# Altium PCB Power_distribution.PcbDoc
Units mil, origin at the board's own origin, x right, y up, seen from the top; angles counter-clockwise.
Board outline 3939.96 x 3343.5 mil, 2 copper layers (Top Layer, Bottom Layer); 43 components, 18 nets, 121 pads, 195 vias.
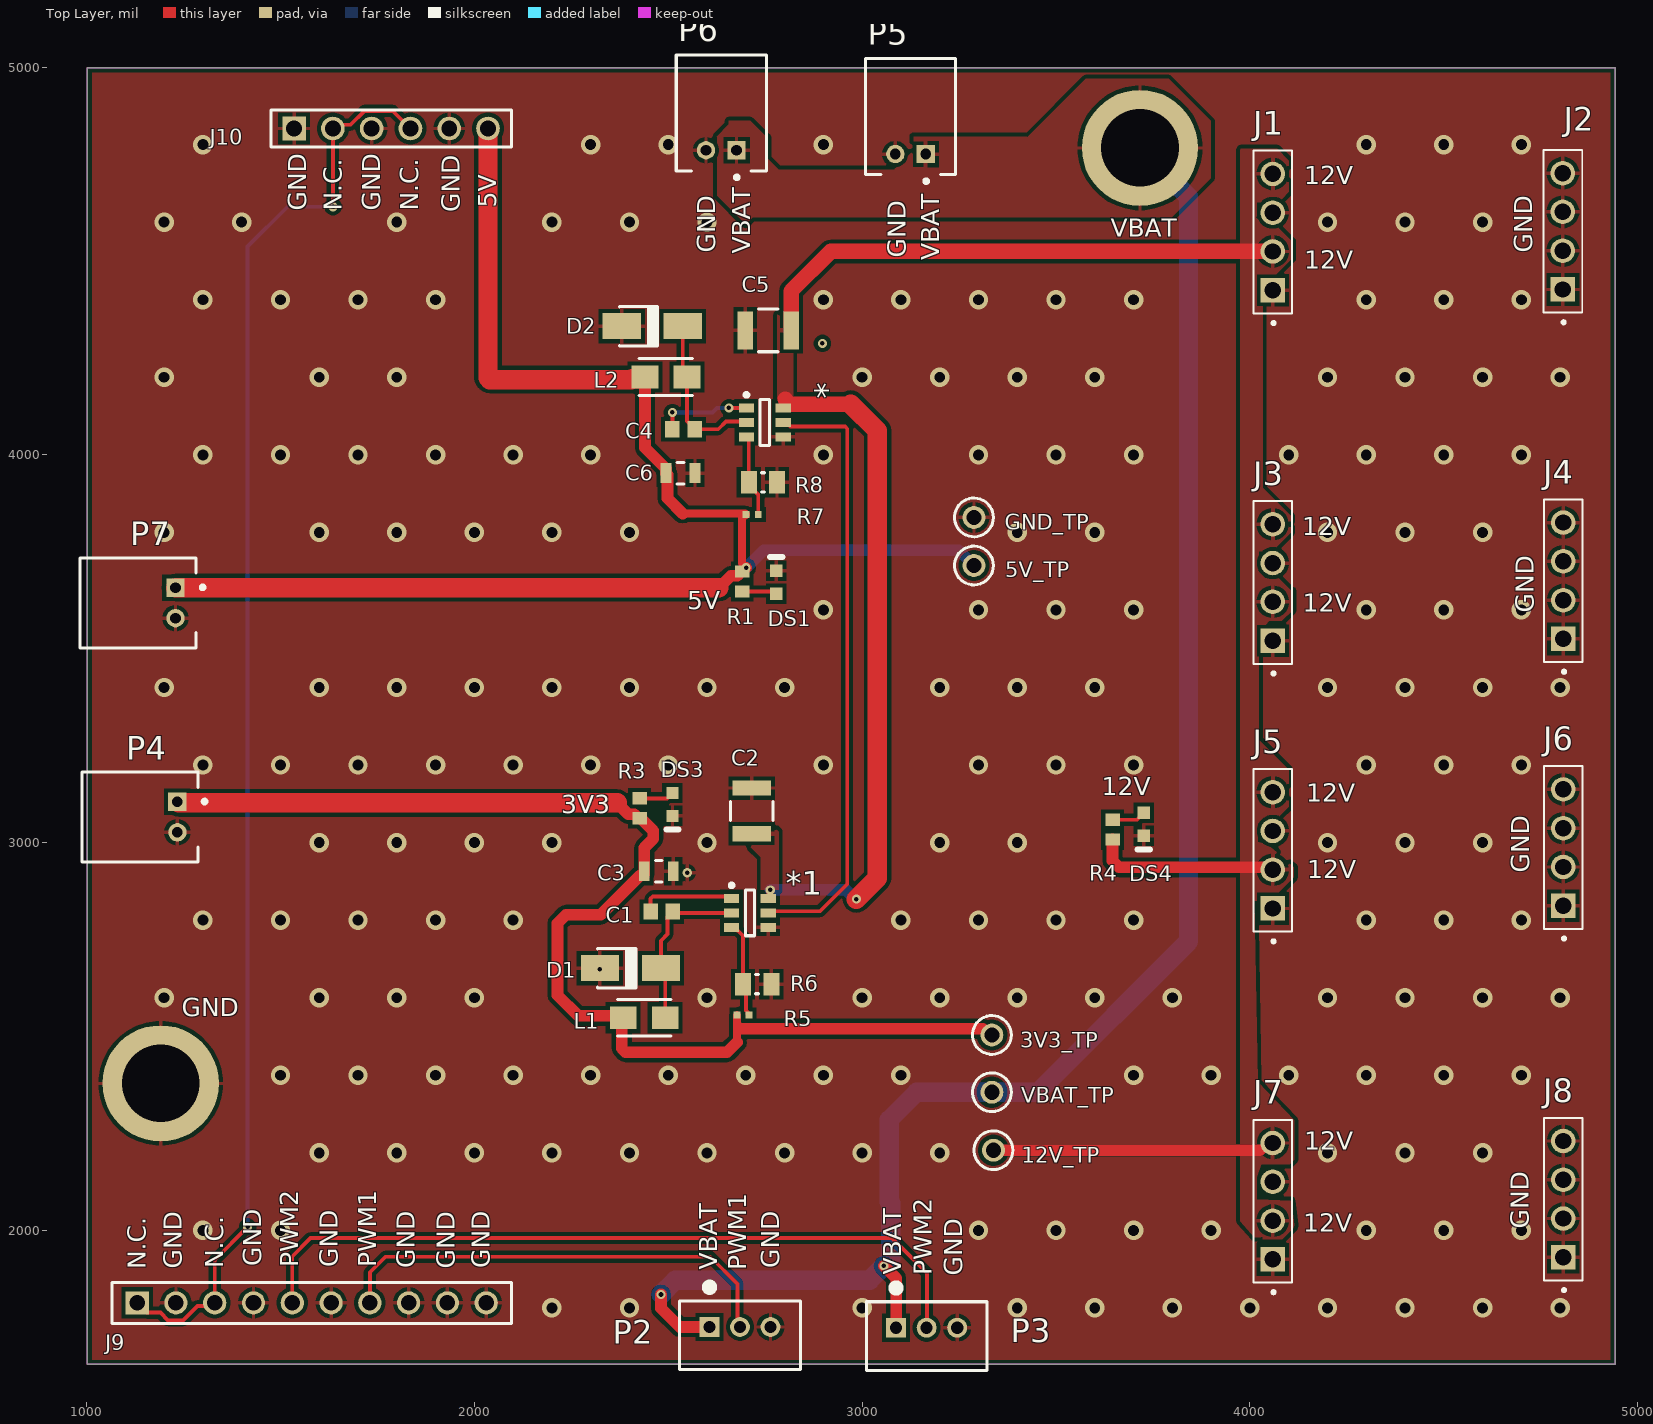
[diagram p0: Top Layer view]
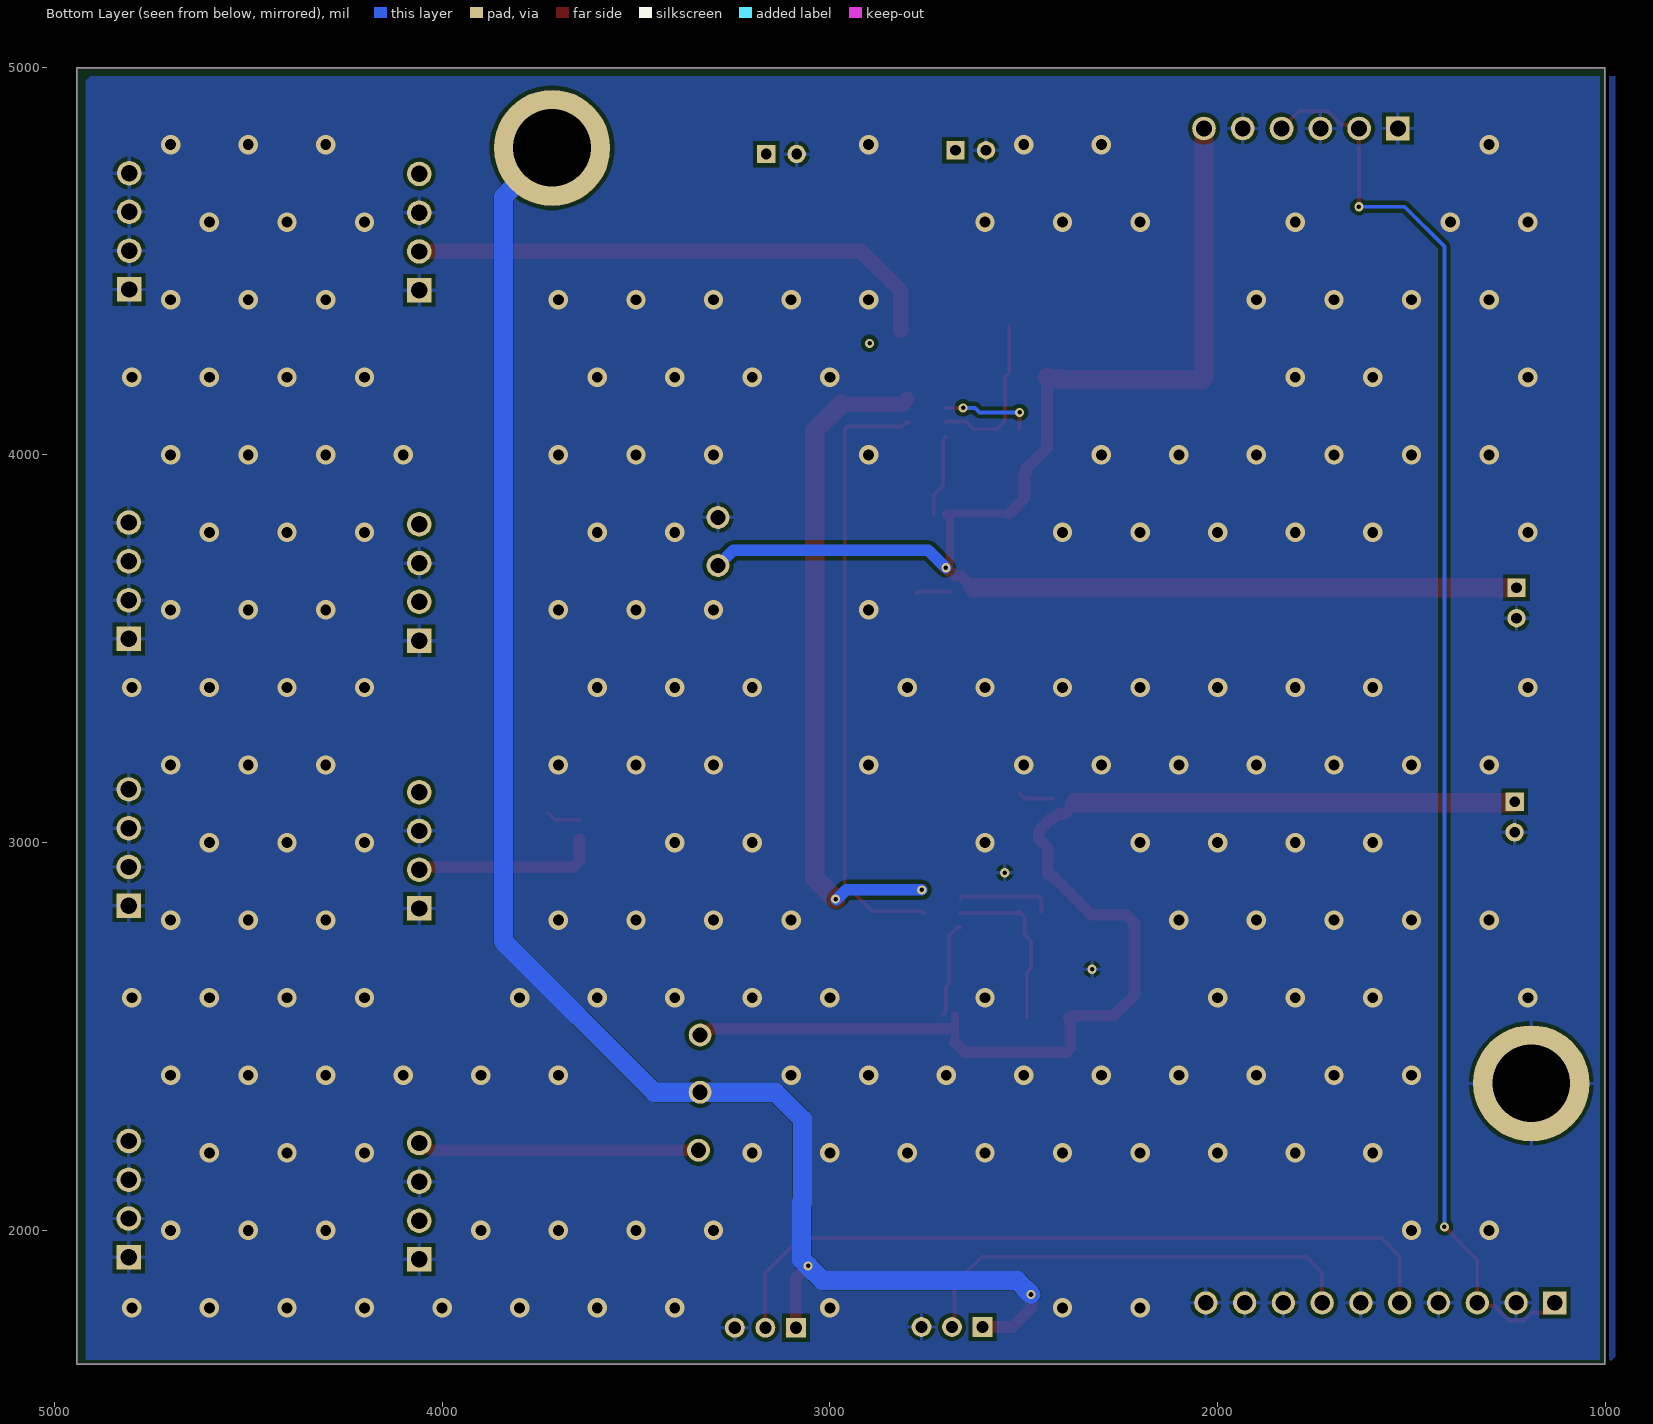
[diagram p1: Bottom Layer view, seen from below]
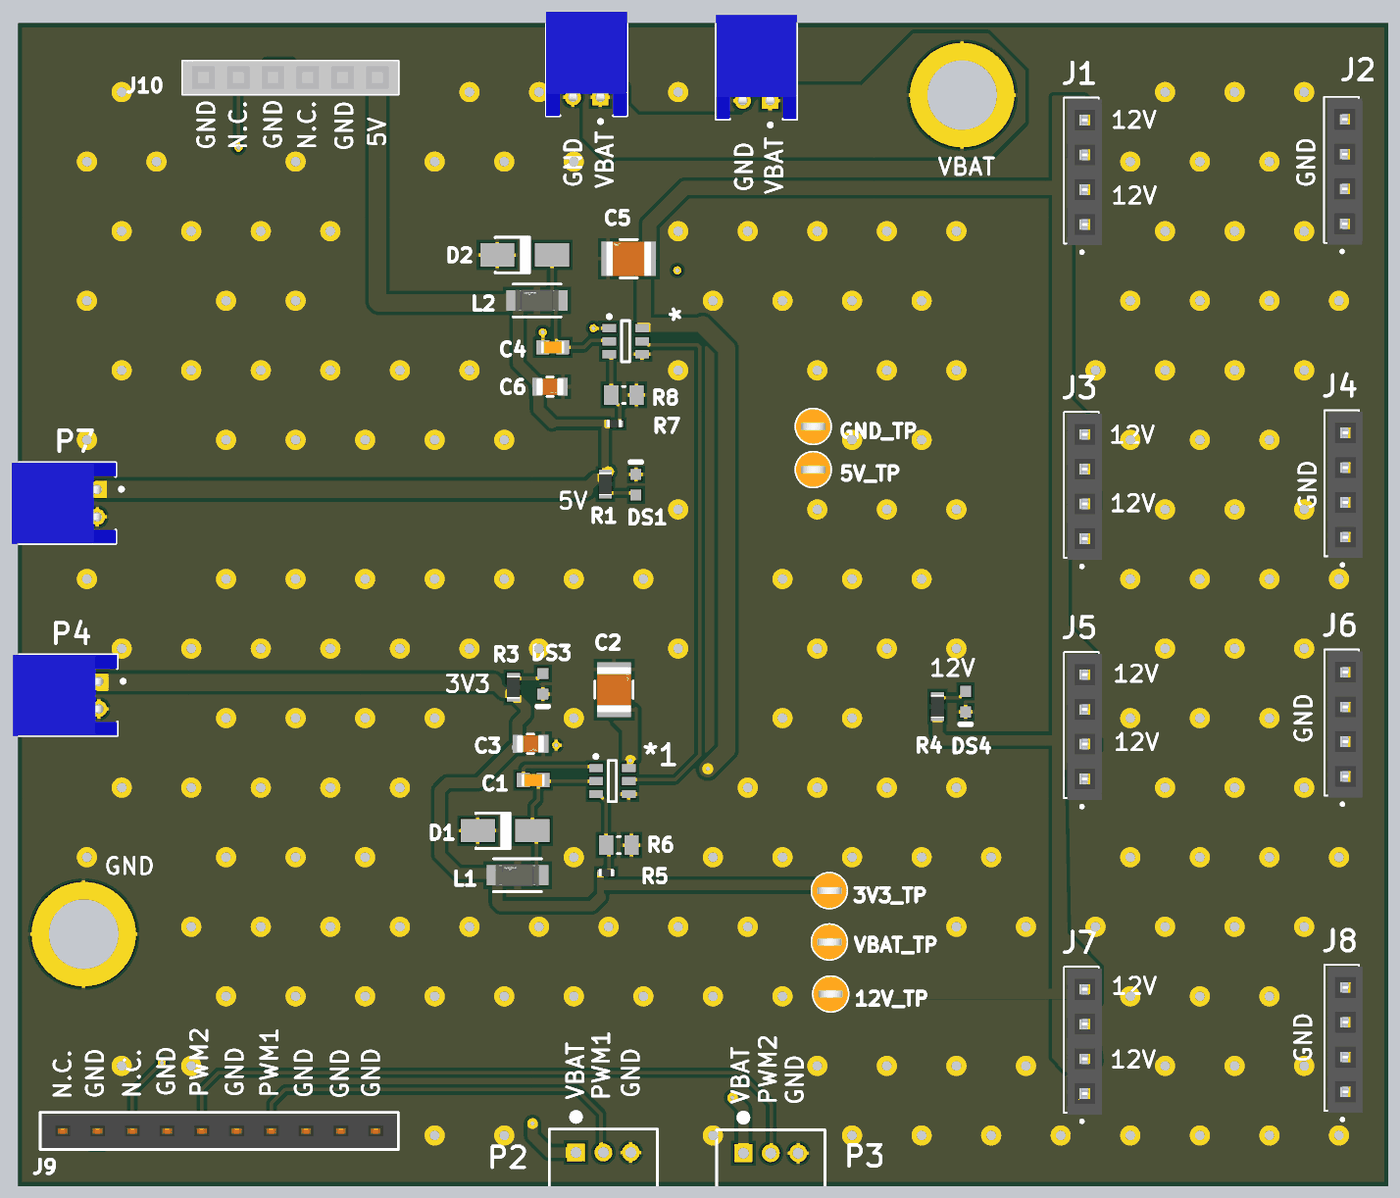
[diagram p2: 3D render of the assembled board from above, using the file's embedded part models]

## Layer stack, top to bottom
Top Solder: solder mask 0.4, Solder Resist, Dk 3.5
Top Layer: signal copper 1.4
Dielectric 1: dielectric 12.6, FR-4, Dk 4.8
Bottom Layer: signal copper 1.4
Bottom Solder: solder mask 0.4, Solder Resist, Dk 3.5

## Board outline
1001.97,1654.53 1001.97,4998.03 4941.93,4998.03 4941.93,1654.53

## Design rules (kind name [scope] priority, off if disabled: settings)
Clearance "Stitching GND" [IsStitchingVia and InNet('GND') vs (IsVia and (Not IsStitchingVia)) Or IsPad] p1: gap=39.37 ignorepadtopadclearanceinfootprint=FALSE
Clearance "Stitching No Net" [IsStitchingVia and InNet('No Net') vs (IsVia and (Not IsStitchingVia)) Or IsPad] p2: gap=5 ignorepadtopadclearanceinfootprint=FALSE
Clearance [All] p3: gap=0 ignorepadtopadclearanceinfootprint=FALSE
HoleSize [All] p1: absolutevalues=TRUE maxlimit=200 minlimit=1 maxpercent=80.000 minpercent=20.000
MinimumSolderMaskSliver [All] p1: minsoldermaskwidth=0
PolygonConnect [All] p1: connectstyle=Relief reliefconductorwidth=10 reliefentries=4 polygonreliefangle="90 Angle" airgapwidth=10
RoutingVias [All] p1: holewidth=28 width=50 viastyle="Through Hole" minholewidth=28 minwidth=50 maxholewidth=28 maxwidth=50
ShortCircuit [All] p1: allowed=TRUE
SilkToSilkClearance [All] p1: silktosilkclearance=0
SilkToSolderMaskClearance [IsPad] p1: minsilkscreentomaskgap=0 clearancetoexposedcopper=TRUE
SolderMaskExpansion [All] p1: expansion=4 istentingtop=FALSE
Width [All] p1: maxlimit=50 minlimit=10 preferedwidth=10 minimp=50.000000 maximp=50.000000 favimp=50.000000
25 further rules are at their usual default settings.

## Classes and differential pairs
component class Sheet3: 12V_TP DS1 DS3 DS4 GND_TP J1 J2 J3 J5 J6 J7 J8 J9 R1 R3 R4
component class Sheet1: 3V3_TP 5V_TP * *1 C1 C2 C3 C4 C5 C6 D1 D2 L1 L2 P2 P3 P4 P5 P6 P7 R5 R6 R7 R8 VBAT_TP

## Components (designator, comment, footprint, x,y, rotation, side; value= is the part's Value field where it differs from the comment)
3V3_TP "5003" KSTN-5003 3334.65,2503.94 r0 top (schematic designator TP4)
5V_TP "5003" KSTN-5003 3288.39,3714.57 r0 top (schematic designator TP5)
12V_TP "5003" KSTN-5003 3338.58,2206.69 r0 top (schematic designator TP2)
* "UD24121G-AG6-R" SOT95P245X110-6N 2789.02,4083.66 r0 top
*1 "UD24121G-AG6-R" SOT95P245X110-6N 2750.63,2818.9 r0 top
C1 "10nF" CAPC1608X90X35ML10T15 2483.27,2821.85 r0 top
C2 "10uF" FP-1210-L_3_3_0_4-W_2_5_0-MFG 2715.55,3081.69 r90 top
C3 "22uF" FP-GRM21B-0_15-MFG 2475.46,2926.18 r0 top
C4 "10nF" CAPC1608X90X35ML10T15 2539.37,4065.94 r0 top
C5 "10uF" FP-1210-L_3_3_0_4-W_2_5_0-MFG 2757.87,4320.87 r180 top
C6 "22uF" FP-GRM21B-0_15-MFG 2531.56,3952.76 r0 top
D1 "B230A-13-F" DIOD-SMA-2_V 2402.56,2676.18 r0 top
D2 "B230A-13-F" DIOD-SMA-2_V 2458.66,4331.69 r0 top
DS1 "HSMG-C190" AVAG-HSMX-C190_V 2778.55,3671.26 r90 top
DS3 "HSMH-C190" AVAG-HSMX-C190_V 2510.89,3098.43 r270 top
DS4 "HSMD-C190" AVAG-HSMX-C190_V 3726.37,3047.25 r270 top
GND_TP "5003" KSTN-5003 3288.39,3838.58 r0 top (schematic designator TP1)
J1 "PPTC041LFBN-RC" SULLINS_PPTC041LFBN-RC 4059.06,4574.41 r90 top
J2 "PPTC041LFBN-RC" SULLINS_PPTC041LFBN-RC 4807.09,4576.45 r90 top
J3 "PPTC041LFBN-RC" SULLINS_PPTC041LFBN-RC 4059.06,3670.83 r90 top
J4 "PPTC041LFBN-RC" SULLINS_PPTC041LFBN-RC 4808.07,3675.3 r90 top
J5 "PPTC041LFBN-RC" SULLINS_PPTC041LFBN-RC 4059.06,2980.12 r90 top
J6 "PPTC041LFBN-RC" SULLINS_PPTC041LFBN-RC 4808.07,2987.2 r90 top
J7 "PPTC041LFBN-RC" SULLINS_PPTC041LFBN-RC 4059.06,2075.24 r90 top
J8 "PPTC041LFBN-RC" SULLINS_PPTC041LFBN-RC 4808.07,2080.51 r90 top
J9 "61301011821" 61301011821 1580.51,1812.99 r0 top
J10 "SSW-106-02-T-S" SMTC-SSW-106-02-X-S 1535.24,4841.54 r0 top
L1 "4.7uH" FP-LQH31CN_03-MFG 2438.05,2548.23 r180 top
L2 "4.7uH" FP-LQH31CN_03-MFG 2494.16,4200.79 r180 top
P2 "B3B-PH-K-S(LF)(SN)" JST-B3B-PH-K-S-3_V 2685.04,1729.33 r0 top
P3 "B3B-PH-K-S(LF)(SN)" JST-B3B-PH-K-S-3_V 3166.34,1727.36 r0 top
P4 "S2B-PH-K-S(LF)(SN)" JST-S2B-PH-K-S_V 1137.8,3065.94 r270 top
P5 "S2B-PH-K-S(LF)(SN)" JST-S2B-PH-K-S_V 3125,4872.05 r180 top
P6 "S2B-PH-K-S(LF)(SN)" JST-S2B-PH-K-S_V 2636.81,4881.89 r180 top
P7 "S2B-PH-K-S(LF)(SN)" JST-S2B-PH-K-S_V 1132.87,3618.11 r270 top
R1 "1k" RESC1609X50X30NL8T20 2690.94,3673.23 r270 top
R3 "1k" RESC1609X50X30NL8T20 2426.18,3088.58 r90 top
R4 "1k" RESC1609X50X30NL8T20 3645.67,3033.46 r90 top
R5 "49.9K" RESC1005X40X25LL05T05 2692.91,2555.12 r180 top
R6 "16.2K" RESC2013X50X30NL20T20 2729.33,2634.84 r180 top
R7 "49.9K" RESC1005X40X25LL05T05 2716.54,3846.46 r180 top
R8 "16.2K" RESC2013X50X30NL20T20 2744.09,3929.13 r180 top
VBAT_TP "5003" KSTN-5003 3334.65,2356.3 r0 top (schematic designator TP3)

## Footprints (in the part's own frame and the unit in brackets; to place one, negate y for a bottom-side part, rotate by r counter-clockwise, add the part's x,y. Pads: shape width x height; smd on the part's side, far side on the other; paste and mask are expansions set on the pad)
61301011821 [mm] "Socket Header, Pitch 2.54 mm, THT, Vertical, single row, 10p"
  rect 1.52x1.52 hole 1.02: 1(-11.43,0)
  round 1.52 hole 1.02: 2(-8.89,0) 3(-6.35,0) 4(-3.81,0) 5(-1.27,0) 6(1.27,0) 7(3.81,0) 8(6.35,0) 9(8.89,0) 10(11.43,0)
  silkscreen extent -13.08,-1.35 13.08,1.35, body extent -12.95,-1.25 12.95,1.25, height 8.55
AVAG-HSMX-C190_V [mm] "SMD, 2-Leads, Body 1.6x0.8mm, Height 0.9mm"
  rect 0.8x0.8 smd: 1(-0.75,0) 2(0.75,0)
  silkscreen extent 1.65,-0.4 1.65,0.4, body extent -0.8,-0.4 0.8,0.4, height 0.9
CAPC1608X90X35ML10T15 [mm] "Chip Capacitor, 2-Leads, Body 1.7x0.9mm, IPC Low Density"
  rect 0.95x1.05 smd: 1(-0.725,0) 2(0.725,0)
  body extent -0.85,-0.45 0.85,0.45, height 0.9
DIOD-SMA-2_V [mm] "SMA, 2-Leads, Body 4.3x2.605mm, Height 2.3mm"
  rect 2.5x1.7 smd: 1(-2,0) 2(2,0)
  silkscreen extent -2.15,-1.3 0.35,1.33, body extent -2.15,-1.3 2.15,1.3, height 2.3
FP-1210-L_3_3_0_4-W_2_5_0-MFG [mm]
  rect 1x2.5 smd paste+0 mask+0: 1(-1.5,0) 2(1.5,0)
  silkscreen extent -0.62,-1.4 0.62,1.4, body extent -2.1,-1.5 2.1,1.5, height 0.25
FP-GRM21B-0_15-MFG [mm]
  rect 0.7x1.3 smd paste+0 mask+0: 1(-0.95,0) 2(0.95,0)
  silkscreen extent -0.23,-0.7 0.23,0.7, body extent -1.4,-0.8 1.4,0.8, height 0.25
FP-LQH31CN_03-MFG [mm]
  rect 1.75x1.5 smd paste+0 mask+0: 1(-1.375,0) 2(1.375,0)
  silkscreen extent -1.75,-1.2 1.75,1.2, body extent -2.35,-1 2.35,1, height 0.25
JST-B3B-PH-K-S-3_V [mm] "Connector, 3-Leads, Body 7.9x4.5mm, Pitch 2mm"
  rect 1.3x1.3 hole 0.8: 1(-2,0.55)
  round 1.3 hole 0.8: 2(0,0.55) 3(2,0.55)
  silkscreen extent -3.95,-2.25 3.95,3.4, body extent -3.95,-2.25 3.95,2.25, height 6
JST-S2B-PH-K-S_V [mm] "THD, 2-Leads, Body 7.6x5.9mm, Pitch 2mm"
  rect 1.2x1.2 hole 0.7: 1(-1,2.45)
  round 1.2 hole 0.7: 2(1,2.45)
  silkscreen extent -2.95,-3.8 2.95,4.35, body extent -2.95,-3.8 2.95,3.8, height 4.8
KSTN-5003 [mm] "Test Point, Through Hole, Dia 2.54mm"
  round 1.5 hole 1: 1(0,0)
  silkscreen extent -1.27,-1.27 1.27,1.27, body extent -1.27,-1.27 1.27,1.27, height 4.57
RESC1005X40X25LL05T05 [mm] "Chip Resistor, 2-Leads, Body 1.05x0.55mm, IPC High Density"
  rect 0.45x0.45 smd: 1(-0.4,0) 2(0.4,0)
  body extent -0.53,-0.28 0.53,0.28, height 0.4
RESC1609X50X30NL8T20 [mm] "Chip Resistor, 2-Leads, Body 1.65x0.95mm, IPC Medium Density"
  rect 0.8x0.95 smd: 1(-0.65,0) 2(0.65,0)
  body extent -0.82,-0.48 0.82,0.48, height 0.5
RESC2013X50X30NL20T20 [mm] "Chip Resistor, 2-Leads, Body 2.00x1.25mm, IPC Medium Density"
  rect 1.05x1.45 smd: 1(-0.925,0) 2(0.925,0)
  silkscreen extent -0.1,-0.63 0.1,0.63, body extent -1.1,-0.72 1.1,0.72, height 0.5
SMTC-SSW-106-02-X-S [mm] "SQ Post Socket, 1x6 Pins, Vertical, 2.54mm Pitch, Female"
  rect 1.55x1.55 hole 1.04: 1(0,0)
  round 1.55 hole 1.04: 2(2.54,0) 3(5.08,0) 4(7.62,0) 5(10.16,0) 6(12.7,0)
  silkscreen extent -1.53,-1.2 14.23,1.2, body extent -1.52,-1.21 14.22,1.21, height 8.51
SOT95P245X110-6N [mm] "SOT23, 6-Leads, Body 2,90x2,45mm, Pitch 0,95mm, IPC Medium Density"
  rect 1x0.6 smd: 1(-2.216,0.95) 2(-2.216,0) 3(-2.216,-0.95) 4(0.184,-0.95) 5(0.184,0) 6(0.184,0.95)
  silkscreen extent -2.34,-1.5 -0.72,1.92, body extent -1.72,-1.5 -0.32,1.5, height 1.1
SULLINS_PPTC041LFBN-RC [mm]
  rect 1.605x1.605 hole 1.07: 1(-3.81,0)
  round 1.605 hole 1.07: 2(-1.27,0) 3(1.27,0) 4(3.81,0)
  silkscreen extent -6.06,-1.27 5.33,1.27, body extent -5.46,-1.52 5.21,1.02, height 8.51

## Part data
3V3_TP 5V_TP 12V_TP GND_TP VBAT_TP: library part CMP-1672-00009-1, "Test Point, Orange, 1-Pin THD, RoHS", Forward Current="3 A", Forward Voltage="1.08 V", Max Operating Temperature="150 degC", Max Surge Current="80 A", Min Operating Temperature="-65 degC", Package Quantity=500, Peak Reverse Current="600 uA", ComponentLink1Description="Manufacturer URL", ComponentLink1URL=http://www.keyelco.com/, ComponentLink2Description=Datasheet, ComponentLink2URL=http://keyelco.com/userAssets/file/M65p56.pdf, DatasheetVersion=Jun-15, Diameter="5.3 mm", Height="0.25 inch", Length="9.5 mm", Mount="Through Hole", PackageDescription="1-Pin Through Hole Device, Dia 2.54 mm", PackageReference=5003, Packaging=Bulk, Pins=2, Radiation Hardening=No, REACH SVHC="No SVHC", RoHSCompliant=true, Weight="0.01 lb", Width="0.25 inch"
C1 C4: library part CMP-2100-03642-1, "Chip Capacitor, 10 nF, +/- 10%, 50 V, -55 to 125 degC, 0603 (1608 Metric), RoHS, Tape and Reel", Case Code (Metric)=1608, Case Code (Imperial)=0603, Dielectric=X7R, Dielectric Material=Ceramic, Manufacturer=Murata, Max Operating Temperature=125degC, Min Operating Temperature=-55degC, Package Description="2-Pin Surface Mount Device, Body 1.6 x 0.8 mm", Package Quantity=1, Tolerance=10%, Voltage=50V, Insulation Resistance=10GR, Capacitance=10nF, Case/Package=0603, Datasheet URL=http://search.murata.co.jp/Ceramy/image/img/A01X/G101/ENG/GRM188R71H103KA01-01.pdf, Datasheet Version=42401.0, Depth=0.8mm, Height=0.8mm, Lead Free=LeadFree, Length=1.6mm, Manufacturer URL=http://www.murata.com/, Material=Ceramic, Mount=SurfaceMount, Number of Pins=2, Package Reference=0603, Packaging=TapeandReel, REACH SVHC=Unknown, RoHSCompliant=True, Termination=SMD/SMT, Thickness=0.035inch, Voltage Rating=50V, Voltage Rating (DC)=50V, Width=0.031inch
C2 C5: library part CMP-2000-05477-2, "General Purpose Ceramic Capacitor, 1210, 10uF, 10%, X5R, 15%, 25V", Case Code (Metric)=3225, Case Code (Imperial)=1210, Dielectric=X5R, Max Operating Temperature=85°C, Min Operating Temperature=-55°C, Package Quantity=1, Tolerance=10%, Voltage=25V, Capacitance=10uF, Case/Package=1210, Construction=Flat, Contact Plating=Tin, Depth=2.5mm, Height=2.29mm, Lead Free="Lead Free", Length=3.2mm, Mount="Surface Mount", Packaging="Tape and Reel", Radiation Hardening=No, REACH SVHC="No SVHC", RoHS Compliant=Yes, Series=-, Termination=SMD/SMT, Thickness=0.11inch, Voltage Rating=25V, Voltage Rating (DC)=25V, Width=0.098inch
C3 C6: library part CMP-2007-03385-2, "Chip Multilayer Ceramic Capacitors for General Purpose, 0805, 22uF, X5R, 15%, 20%, 6.3V", Case Code (Metric)=2012, Case Code (Imperial)=0805, Dielectric=X5R, Max Operating Temperature=85°C, Min Operating Temperature=-55°C, Package Quantity=1, Tolerance=20%, Voltage=6.3V, Capacitance=22uF, Case/Package=0805, Depth=1.25mm, Height=1.25mm, Lead Free="Lead Free", Length=2mm, Material=Ceramic, Mount="Surface Mount", Packaging="Tape and Reel", Radiation Hardening=No, REACH SVHC="No SVHC", Termination=SMD/SMT, Thickness=0.053inch, Voltage Rating=6.3V, Voltage Rating (DC)=6.3V, Width=0.049inch
D1 D2: library part CMP-0905-00001-1, "2 A Surface Mount Schottky Barrier Rectifier, 30 V, -65 to 150 degC, 2-Pin SMA, RoHS, Tape and Reel", Manufacturer="Diodes Inc", Temperature Range="-65 to 150 degC", ComponentLink1Description="Manufacturer URL", ComponentLink1URL=http://diodes.com/, ComponentLink2Description=Datasheet, ComponentLink2URL=http://diodes.com/datasheets/ds13004.pdf, CT="200 pF", DatasheetVersion="Rev. 21 - 2", Mounting Technology="Surface Mount", PackageDescription="2-Pin SMA, Body 4.3 x 2.605 mm, Height 2.3 mm", PackageReference=SMA-2, Packing="Tape and Reel", PartNumber=B230A-13-F, RoHS=TRUE, VF="0.5 V", VR="30 V", VRRM="30 V", IF="2 A", IFSM="50 A", IO="2 A Max."
DS1: library part CMP-1744-00002-1, "Chip LED, Green, 2.2 V, -40 to 85 degC, 2-Pin SMD, RoHS, Tape and Reel", Case\Package=SOIC, Clock Frequency="100 KHz", Frequency="400 KHz", Max Operating Temperature="85 degC", Max Supply Voltage="5.5 V", Min Operating Temperature="-40 degC", Min Supply Voltage="1.7 V", Nominal Supply Current="2 mA", Package Quantity=3000, Access Time="3500 ns", ComponentLink1Description="Manufacturer URL", ComponentLink1URL=http://www.avagotech.com/, ComponentLink2Description=Datasheet, ComponentLink2URL=http://docs.avagotech.com/docs/AV02-0551EN, ComponentLink3Description="Package Specification", ComponentLink3URL=http://www.fairchildsemi.com/dwg/MA/MA03D.pdf, DatasheetVersion=Mar-12, Density="32 kb", Height="1.5 mm", Length="5 mm", Max Clock Frequency="100 KHz", Mount="Surface Mount", PackageDescription="2-Pin Surface Mount Device, Body 1.6 x 0.8 mm, Height 0.9 mm", PackageReference=HSMX-C190, Packaging="Tape and Reel", Pins=8, Radiation Hardening=No, REACH SVHC="No SVHC", RoHSCompliant=true, Width="4 mm", Interface=Serial
DS3: library part CMP-1744-00004-1, "LED Uni-Color Red, 65 mW, 20 mA, -40 to 85 degC, 2-Pin SMD, RoHS, Tape and Reel", Current Rating="1 A", Max Operating Temperature="85 degC", Min Operating Temperature="-30 degC", Package Quantity=2000, ComponentLink1Description="Manufacturer URL", ComponentLink1URL=http://www.avagotech.com/, ComponentLink2Description=Datasheet, ComponentLink2URL=http://docs.avagotech.com/docs/AV02-0551EN, ComponentLink3Description="Package Specification", ComponentLink3URL=http://www.fairchildsemi.com/dwg/MA/MA03D.pdf, Connector Type=USB, Contact Material=Copper, Contact Plating=Gold, DatasheetVersion=Mar-12, Gender=Male, Height="2.8 mm", Lead Pitch="0.65 mm", Length="7.5 mm", Mount="Surface Mount", PackageDescription="2-Pin Surface Mount Device, Body 1.6 x 0.8 mm, Height 0.9 mm", PackageReference=HSMX-C190, Packaging="Tape and Reel", Pins=5, REACH SVHC="No SVHC", RoHSCompliant=true, Width="5.6 mm"
DS4: library part CMP-1744-00006-1, "LED Uni-Color Orange, 52 mW, 20 mA, -40 to 85 degC, 2-Pin SMD, RoHS, Tape and Reel", Max Operating Temperature=225degC, Min Operating Temperature=-40degC, Package Quantity=100, ComponentLink1Description="Manufacturer URL", ComponentLink1URL=http://www.avagotech.com/, ComponentLink2Description=Datasheet, ComponentLink2URL=http://docs.avagotech.com/docs/AV02-0551EN, ComponentLink3Description="Package Specification", ComponentLink3URL=http://www.fairchildsemi.com/dwg/MA/MA03D.pdf, DatasheetVersion=Mar-12, PackageDescription="2-Pin Surface Mount Device, Body 1.6 x 0.8 mm, Height 0.9 mm", PackageReference=HSMX-C190, RoHSCompliant=True
J1 J2 J3 J4 J5 J6 J7 J8: "4 Position Header Connector Through Hole", Package=None, Availability=Warning, Check_prices=https://www.snapeda.com/parts/PPTC041LFBN-RC/Sullins%20Connector%20Solutions/view-part/285917/?ref=eda, MF="Sullins Connector", MP=PPTC041LFBN-RC, Price=None, Purchase-URL=https://pricing.snapeda.com/search/part/PPTC041LFBN-RC/?ref=eda, SnapEDA_Link=https://www.snapeda.com/parts/PPTC041LFBN-RC/Sullins%20Connector%20Solutions/view-part/285917/?ref=snap
J9: library part CMP-1502-01332-1, "THT Vertical Socket Header WR-PHD, Pitch 2.54 mm, Single Row, 10 pins", Contact Resistance=20mOhm, Manufacturer="Wurth Elektronik", Operating Temperature=-40to125degC, Rated Current=3A, Withstanding Voltage=500VAC, Working Voltage=250VAC, Datasheet URL=https://katalog.we-online.de/em/datasheet/6130xx11821.pdf, Gender=Female, Manufacturer URL=http://www.we-online.de, Mounting Technology=THT, Orientation=Vertical, Package Reference=61301011821, Packaging=Tray, Part Number=61301011821, Pin Number=10, Pitch=2.54mm, Publisher=WurthElektronik, Row Number=Single
J10: library part CMP-1023-00360-1, "SQ Post Socket, Through-hole, Vertical, -55 to 105 degC, 2.54mm Pitch, 6-Pin, Female, RoHS", Manufacturer=Samtec, Temperature Range="-55 to 105 degC", ComponentLink1Description="Manufacturer URL", ComponentLink1URL=http://www.samtec.com, ComponentLink2Description=Datasheet, ComponentLink2URL=http://www.samtec.com/documents/webfiles/pdf/SSW_TH.PDF, ComponentLink3Description="Package Specification", ComponentLink3URL=http://www.samtec.com/documents/webfiles/cpdf/SSW-1XX-XX-XXX-X-XX-XXX-XX-MKT.pdf, DatasheetVersion=F-214, Mounting Technology=Through-hole, Orientation=Vertical, PackageDescription="Assembly, Socket Strip .016 X .031 Tail", PackageReference=SSW-106-02-X-S, PackageVersion="CA, 6/1987", PartNumber=SSW-106-02-T-S, Pitch="2.54 mm", RoHS=True
L1 L2: library part CMP-06042-006664-1, "Wire Wound Ferrite Inductor for General Circuits 4.7μH ±10% 2.21Ω 120mA 1206", Case Code (Metric)=3216, Case Code (Imperial)=1206, Current=105mA, Current Rating=120mA, DC Resistance (DCR)=1.7R, Max Operating Temperature=85°C, Min Operating Temperature=-25°C, Package Quantity=1, Self Resonant Frequency=31MHz, Test Frequency=1MHz, Tolerance=10%, Case/Package=1206, Core Material=Ferrite, DC Current=120mA, Depth=1.8mm, Height=1.8mm, Lead Free="Lead Free", Length=0.125inch, Max DC Current=120mA, Military Standard=Not, Mount="Surface Mount", Packaging="Tape and Reel", Q Factor=35, Radiation Hardening=No, REACH SVHC="No SVHC", Shielding=Unshielded, Termination=SMD/SMT, Weight=0.001023oz, Width=1.6mm, Inductance=4.7uH, Inductance Tolerance=10%
P2 P3: library part CMP-2000-05164-1, "Male Header, Pitch 2 mm, 1 x 3 Position, Height 6 mm, Tail Length 3.4 mm, -25 to 85 degC, RoHS, Bulk", Manufacturer=JST, Datasheet URL=https://datasheet.ciiva.com/11746/0900766b80826550-11746939.pdf, Datasheet Version=Oct-06, Manufacturer URL=http://www.jst.com/home2.html, No of Positions=3, Pitch=2mm, Style/Orientation=StraightHeader/Plug, Termination=Crimp, Type=ShroudedHeader
P4 P5 P6 P7: library part CMP-1755-00004-1, "Male Header, Pitch 2 mm, 1 x 2 Position, Height 4.8 mm, Tail Length 3.4 mm, -25 to 85 degC, RoHS, Bulk", Capacitance="10 uF", Case\Package=Radial, Max Operating Temperature="85 degC", Min Operating Temperature="-40 degC", Package Quantity=200, Tolerance=20%, Voltage Rating="50 V", ComponentLink1Description=Datasheet, ComponentLink1URL=http://www.jst-mfg.com/product/pdf/eng/ePH.pdf, DatasheetVersion=Dec-12, Diameter="5 mm", Height="11 mm", Lead Pitch="2 mm", Length="11 mm", Mount="Through Hole", PackageDescription="Male Header, Pitch 2 mm, 1 x 2 Position, Height 4.8 mm, Tail Length 3.4 mm", PackageReference=S2B-PH-K-S, Packaging=Bulk, Pins=2, Radiation Hardening=No, REACH SVHC="No SVHC", RoHSCompliant=true, Voltage Rating (DC)="50 V"
R1 R3 R4: library part CMP-2000-03816-5, "Chip Resistor, 0 Ohm, Jumper, 100 mW, -55 to 155 degC, 0603 (1608 Metric), RoHS, Tape and Reel", Manufacturer="Vishay Semiconductor", Max Operating Temperature="155 degC", Min Operating Temperature="-55 degC", Package Quantity=5000, Voltage Rating="75 V", ComponentLink1Description="Manufacturer URL", ComponentLink1URL=http://www.vishay.com/, ComponentLink2Description=Datasheet, ComponentLink2URL=http://www.vishay.com/docs/20035/dcrcwe3.pdf, DatasheetVersion=06/2012, Height="0.45 mm", Length="1.55 mm", Mount="Surface Mount", Mounting Technology="Surface Mount", PackageDescription="2-Pin Surface Mount Device, Body 1.575 x 0.85 mm", PackageReference=0603, Packaging="Tape and Reel", Pins=2, REACH SVHC=Unknown, RoHSCompliant=true
R5 R7: library part CMP-2002-00967-3, "Chip Resistor, 49.9 KOhm, +/- 1%, 100 mW, -55 to 155 degC, 0402 (1005 Metric), RoHS, Tape and Reel", Case Code (Metric)=1005, Case Code (Imperial)=0402, Manufacturer="Basic Passives", Max Operating Temperature="155 degC", Min Operating Temperature="-55 degC", Package Quantity=10000, PartNumber=ERJ-2RKF4992X, Power Rating="100 mW", Resistance="49.9 KOhm", Tolerance=1%, Voltage Rating="50 V", Case\/Package=0402, ComponentLink1Description="Manufacturer URL", ComponentLink1URL=http://www.panasonic.com/, ComponentLink2Description=Datasheet, ComponentLink2URL=http://industrial.panasonic.com/cdbs/www-data/pdf/RDA0000/AOA0000C86.pdf, DatasheetVersion=04/2015, Height="0.35 mm", Length="1 mm", Mount="Surface Mount", Mounting Technology="Surface Mount", PackageDescription="2-Pin Surface Mount Device, Body 1 x 0.5 mm", PackageReference=0402, Packaging="Tape and Reel", Pins=2, Radiation Hardening=No, REACH SVHC="No SVHC", RoHSCompliant=true, Width="0.5 mm"
R6 R8: library part CMP-1013-00645-2, Manufacturer="Vishay Dale", Part Number=CRCW080516K2FKEA

## Free pads (board coordinates)
  round 300 hole 200: 2(1190.94,2378.94) 2(3716.54,4791.34)

## Via types
v1: diameter 50, hole 28, Top Layer to Bottom Layer, 183 vias
v2: diameter 23.62, hole 11.81, Top Layer to Bottom Layer, 12 vias

## Nets (pads, with @x,y where several pads share a name; then routed paths per layer and width w, separated by ;. In a path a pad name is that pad's centre, name@x,y a point inside that pad or via, vN(x,y) a via of type N, cw(c..) or ccw(c..) an arc to the next point about the centre after c; other vN are vias at no path point)
3V3: 3V3_TP.1 C3.1 L1.2 P4.1 R3.1 R5.2 | length 3177.7
  Top Layer w10: R5.2 2679.09,2553.19 2681.02,2551.26 2681.02,2543.83
  Top Layer w20: 2677.17,2485.24 2677.17,2519.68 2677.17,2532.48 ; R5.2 2677.17,2532.48 ; 2689.96,2519.68 2677.17,2532.48
  Top Layer w30: P4.1 P4.1@1237.2,3102.36 ; 2368.19,3102.36 2397.12,3073.43 2412.8,3073.43 2422.48,3063.74 2425.43,3063.74 R3.1 ; R3.1@2429.13,3062.99 2461.61,3030.51 2461.61,3009.84 2438.05,2986.28 2438.05,2916.81 2436.83,2915.59 2427.46,2915.59 2325.9,2814.02 2236.27,2814.02 2214.57,2792.32 2214.57,2606.3 2267.72,2553.15 2364.47,2553.15 2374.08,2553.15 2379,2548.23 L1.2 2379.92,2544.23 2379.92,2469.49 2389.76,2459.65 2651.57,2459.65 2677.17,2485.24 ; 2689.96,2519.68 3311.04,2519.68 3326.78,2503.94 3V3_TP.1
  Top Layer w50: P4.1@1237.2,3102.36 2368.19,3102.36
+5: 5V_TP.1 C6.1 J10.6 L2.2 P7.1 R1.1 R7.2 | length 3861
  Top Layer w20: 2537.4,3848.43 2698.82,3848.43 R7.2 2700.79,3845.57 2689.96,3834.74 2689.96,3720.47 2700.79,3709.64 v2(2700.79,3708.66)
  Top Layer w30: L2.2@2440.02,4189.96 2440.02,4018.7 2494.16,3964.57 C6.1 2498.03,3948.88 2498.03,3887.8 2537.4,3848.43 ; 2630.98,3657.48 2661.89,3688.39 2677.56,3688.39 2687.99,3698.82 R1.1 v2(2700.79,3708.66)
  Top Layer w40: 2035.24,4198.03 2039.37,4193.9
  Top Layer w50: P7.1 2630.98,3657.48 ; 2035.24,4198.03 J10.6 ; 2039.37,4193.9 2404.51,4193.9 2406.87,4196.26 2435.5,4196.26 L2.2
  Bottom Layer w30: v2(2700.79,3708.66) 2746.06,3753.94 3249.02,3753.94 5V_TP.1
+12: 12V_TP.1 *1.6 *.6 C2.1 C5.1 J1.2 J1.4 J3.2 J3.4 J5.2 J5.4 J7.2 J7.4 R4.1 | length 4324.8
  Top Layer w10: 4026.12,2206.69 4044.66,2225.24 J7.4
  Top Layer w30: 12V_TP.1 4026.12,2206.69 ; R4.1 3645.67,2952.76 3662.4,2936.02 4053.15,2936.02 J5.2
  Top Layer w40: 2801.26,4142.87 2813.23,4130.91 2970.47,4130.91 ; C5.1 2816.93,4422.24 2919.09,4524.41 J1.2
  Top Layer w50: 2970.47,4130.91 3039.37,4062.01 3039.37,2908.46 v2(2985.24,2854.33)
  Bottom Layer w30: v2(2762.87,2878.11) 2957.99,2878.11 v2@2983.5,2852.6
GND: *1.4 *.4 C2.2 C3.2 C5.2 C6.2 D1.1 D2.1 DS1.2 DS3.2 DS4.2 GND_TP.1 J1.1 J1.3 J2.1 J2.2 J2.3 J2.4 J3.1 J3.3 J4.1 J4.2 J4.3 J4.4 J5.1 J5.3 J6.1 J6.2 J6.3 J6.4 J7.1 J7.3 J8.1 J8.2 J8.3 J8.4 J9.2 J9.4 J9.6 J9.8 J9.9 J9.10 J10.1 J10.3 J10.5 P2.3 P3.3 P4.2 P5.2 P6.2 P7.2 pad.2@1190.94,2378.94 R6.1 R8.1
  other v1: 2200,1800 2400,1800 3000,1800 3400,1800 3600,1800 3800,1800 4000,1800 4200,1800 4400,1800 4600,1800 4800,1800 1300,2000 1500,2000 3300,2000 3500,2000 3700,2000 3900,2000 4300,2000 4500,2000 4700,2000 1600,2200 1800,2200 2000,2200 2200,2200 2400,2200 2600,2200 2800,2200 3000,2200 3200,2200 4200,2200 4400,2200 4600,2200 1500,2400 1700,2400 1900,2400 2100,2400 2300,2400 2500,2400 2700,2400 2900,2400 3100,2400 3700,2400 3900,2400 4100,2400 4300,2400 4500,2400 4700,2400 1200,2600 1600,2600 1800,2600 2000,2600 2600,2600 3000,2600 3200,2600 3400,2600 3600,2600 3800,2600 4200,2600 4400,2600 4600,2600 4800,2600 1300,2800 1500,2800 1700,2800 1900,2800 2100,2800 3100,2800 3300,2800 3500,2800 3700,2800 4300,2800 4500,2800 4700,2800 1600,3000 1800,3000 2000,3000 2200,3000 2600,3000 3200,3000 3400,3000 4200,3000 4400,3000 4600,3000 1300,3200 1500,3200 1700,3200 1900,3200 2100,3200 2300,3200 2500,3200 2900,3200 3300,3200 3500,3200 3700,3200 4300,3200 4500,3200 4700,3200 1200,3400 1600,3400 1800,3400 2000,3400 2200,3400 2400,3400 2600,3400 2800,3400 3200,3400 3400,3400 3600,3400 4200,3400 4400,3400 4600,3400 4800,3400 2900,3600 3300,3600 3500,3600 3700,3600 4300,3600 4500,3600 4700,3600 1200,3800 1600,3800 1800,3800 2000,3800 2200,3800 2400,3800 3400,3800 3600,3800 4200,3800 4400,3800 4600,3800 1300,4000 1500,4000 1700,4000 1900,4000 2100,4000 2300,4000 2900,4000 3300,4000 3500,4000 3700,4000 4100,4000 4300,4000 4500,4000 4700,4000 1200,4200 1600,4200 1800,4200 3000,4200 3200,4200 3400,4200 3600,4200 4200,4200 4400,4200 4600,4200 4800,4200 1300,4400 1500,4400 1700,4400 1900,4400 2900,4400 3100,4400 3300,4400 3500,4400 3700,4400 4300,4400 4500,4400 4700,4400 1200,4600 1400,4600 1800,4600 2200,4600 2400,4600 2600,4600 4200,4600 4400,4600 4600,4600 1300,4800 2300,4800 2500,4800 2900,4800 4300,4800 4500,4800 4700,4800
  other v2: 2323.82,2673.23 2549.21,2922.24
N.C: J9.1 J9.3 J10.2 J10.4 | length 3699.4
  Top Layer w10: J9.1 1155.43,1788.07 1190.28,1788.07 1210.28,1768.07 1249.12,1768.07 1285.59,1804.54 1322.06,1804.54 J9.3 1330.51,1924.02 v2(1415.35,2008.86) ; v2(1635.83,4639.76) 1635.24,4640.35 J10.2 1645,4851.3 1680.64,4851.3 1716.38,4887.05 1789.72,4887.05 J10.4
  Bottom Layer w10: v2(1415.35,2008.86) 1415.35,4537.4 1517.72,4639.76 v2(1635.83,4639.76)
Net*1_1: *1.1 C1.1 | length 246.6
  Top Layer w10: C1.1 2454.72,2855.36 2460.58,2861.22 2658.46,2861.22 *1.1
Net*1_2: *1.2 C1.2 D1.2 L1.1 | length 443.6
  Top Layer w10: L1.1 2492.19,2665.29 D1.2 2481.3,2747.01 2498.11,2763.82 2498.11,2808.15 C1.2 2514.76,2818.9 *1.2
Net*1_3: *1.3 R5.1 R6.2 | length 249.7
  Top Layer w10: *1.3 2671.26,2781.5 2692.91,2759.84 R6.2 2700.79,2626.97 2700.79,2570.43 2701.02,2570.19 2701.02,2566.62 2704.8,2562.84 2704.8,2558.98 R5.1
Net*_1: *.1 C4.1 | length 243.3
  Top Layer w10: C4.1 v2(2510.83,4109.25) v2@2513.78,4112.2 ; v2(2656.5,4121.06) *.1
  Bottom Layer w10: v2(2510.83,4109.25) 2614.17,4109.25 2625.98,4121.06 v2(2656.5,4121.06)
Net*_2: *.2 C4.2 D2.2 L2.1 | length 421.2
  Top Layer w10: D2.2 2537.4,4211.68 L2.1 2548.29,4087.54 2567.91,4067.91 C4.2 2628.9,4065.94 2648.58,4085.63 2699.8,4085.63 *.2
Net*_3: *.3 R7.1 R8.2 | length 212.4
  Top Layer w10: *.3 2707.68,4040.35 R8.2 2707.68,3921.26 2732.28,3896.65 R7.1
NetDS1_1: DS1.1 R1.2 | length 90
  Top Layer w10: R1.2 2772.64,3647.64 DS1.1
NetDS3_1: DS3.1 R3.2 | length 90.4
  Top Layer w10: R3.2 2497.11,3114.17 DS3.1
NetDS4_1: DS4.1 R4.2 | length 88
  Top Layer w10: R4.2 3708.66,3059.06 DS4.1
OFF/ON: *1.5 *.5 | length 1580.4
  Top Layer w10: *1.5 2761.81,2822.83 2890.75,2822.83 2961.61,2893.7 2961.61,4067.21 2955.76,4073.07 2814.72,4073.07 2804.13,4083.66 *.5
PWM1: J9.7 P2.2 | length 1186.2
  Top Layer w10: J9.7 1730.51,1891.93 1770.67,1932.09 2608.27,1932.09 2678.15,1862.2 2678.15,1757.87 P2.2
PWM2: J9.5 P3.2 | length 1953.7
  Top Layer w10: J9.5 1530.51,1933.07 1577.76,1980.32 3076.77,1980.32 3167.32,1889.76 P3.2@3167.32,1750
VBAT: P2.1 P3.1 P5.1 P6.1 pad.2@3716.54,4791.34 VBAT_TP.1 | length 4404.2
  Top Layer w30: v2(2481.3,1834.65) 2481.3,1799.21 2529.53,1750.98 P2.1 ; v2(3056.1,1908.46) 3087.6,1876.97 P3.1
  Bottom Layer w50: v2(2481.3,1834.65) 2518.21,1871.56 3019.19,1871.56 v2(3056.1,1908.46) 3073.68,1926.04 3073.68,2070.02 3069.88,2073.82 3069.88,2285.43 3140.75,2356.3 VBAT_TP.1 3452.76,2356.3 3841.54,2745.08 3841.54,4665.42 3716.54,4790.42 pad.2@3716.54,4791.34
copper on no net:
  other v2: 2897.64,4287.4

## Polygon pours and split planes (outlines as drawn)
GND on Top Layer "GND_L01_P023" (solid, pour order 23): 1017.72,4999.02 4955.71,4999.02 4944.88,4988.19 4944.88,1661.42 1017.72,1661.42 1011.81,1667.32 1011.81,5014.76
VBAT on Top Layer "VBAT_L01_P040" (solid, pour order 40): 2656.5,4864.17 2656.5,4852.36 2625,4820.87 2625.98,4819.88 2625.98,4668.31 2699.8,4594.49 2717.52,4612.2 3798.23,4612.2 3898.62,4712.6 3898.62,4861.22 3790.35,4969.49 3576.77,4969.49 3426.18,4818.9 3424.21,4820.87 3132.87,4820.87 3132.87,4785.43 3084.65,4737.2 3084.65,4735.24 2784.45,4735.24 2754.92,4764.76 2754.92,4818.9 2753.94,4818.9 2711.61,4861.22 2652.56,4861.22
+12 on Top Layer "+12_L01_P022" (solid, pour order 22): 4032.48,1983.43 4032.48,1977.36 4083.66,1977.36 4112.2,2005.91 4114.17,2013.78 4106.3,2076.77 4017.72,2080.71 4017.72,2097.44 4017.72,2136.61 4029.46,2170.28 4102.36,2170.28 4114.17,2182.09 4114.17,2283.46 4019.68,2382.87 4011.81,2850.39 4021.65,2850.39 4036.42,2865.16 4067.91,2865.16 4113.19,2910.43 4113.19,2937.01 4050.2,2992.13 4020.67,3001.62 4020.67,3049.21 4037.4,3065.94 4073.82,3065.94 4100.39,3092.52 4100.39,3187.99 4022.64,3265.75 4022.64,3544.29 4050.2,3571.85 4082.68,3571.85 4109.25,3598.43 4109.25,3649.61 4106.3,3649.61 4073.82,3682.09 4039.37,3682.09 4019.68,3701.77 4022.64,3704.72 4022.64,3751.97 4058.07,3751.97 4105.31,3799.21 4105.31,3842.52 4032.48,3915.35 4032.48,4446.85 4020.67,4458.66 4061.02,4458.66 4108.27,4505.91 4108.27,4550.2 4067.91,4590.55 4036.42,4590.55 4014.76,4612.2 4017.72,4615.16 4017.72,4651.57 4073.82,4651.57 4100.39,4678.15 4100.39,4758.86 4069.88,4789.37 3972.44,4789.37 3975.39,4786.42 3975.39,2023.62 4011.81,1982.28 4033.46,1982.28
+12 on Top Layer "+12_L01_P015" (solid, pour order 15): 2839.57,4376.97 2793.31,4376.97 2781.5,4365.16 2781.5,4116.14 2794.29,4103.35 2821.85,4103.35 2821.85,4261.81 2844.49,4284.45 2844.49,4366.14 2836.61,4374.02 2838.58,4374.02
+12 on Top Layer "+12_L01_P021" (solid, pour order 21): 2785.43,2840.55 2784.45,2841.54 2739.17,2841.54 2739.17,2961.61 2710.63,2990.16 2674.21,2990.16 2674.21,3045.28 2672.24,3047.24 2765.75,3047.24 2784.45,3028.54 2784.45,2838.58
GND on Bottom Layer "GND_L02_P035" (solid, pour order 35): 974.9,4976.38 4906.99,4976.38 4918.8,4964.57 4918.8,1642.72 4906,1655.51 993.6,1655.51 974.9,1674.21

## Keep-outs
Keep-Out Layer:
  the board outline again, w3.94

## Silkscreen, mask and mechanical layers (free items; w line width, h text height)
Top Overlay:
  region: 1315.94,5114.17
  region: 1315.94,5114.17
  region: 1315.94,5114.17
  region: 1315.94,5114.17
  text "12V" at 4139.76,4697.83 h47.24
  text "5V" at 2057.09,4636.81 h47.24 r90
  text "GND" at 1757.87,4629.92 h47.24 r90
  text "GND" at 1565.94,4628.94 h47.24 r90
  text "N.C." at 1657.48,4628.94 h47.24 r90
  text "N.C." at 1855.32,4628.94 h47.24 r90
  text "GND" at 1962.6,4625.98 h47.24 r90
  text "VBAT" at 3641.73,4562.99 h47.24
  text "GND" at 2621.06,4520.67 h47.24 r90
  text "GND" at 4728.35,4520.67 h47.24 r90
  text "VBAT" at 2711.61,4518.7 h47.24 r90
  text "GND" at 3112.2,4507.87 h47.24 r90
  text "VBAT" at 3198.82,4501.97 h47.24 r90
  text "12V" at 4140.75,4480.31 h47.24
  text "12V" at 4134.84,3792.32 h47.24
  text "5V" at 2549.21,3602.36 h47.24
  text "12V" at 4136.81,3595.47 h47.24
  text "GND" at 4732.28,3592.52 h47.24 r90
  text "12V" at 3618.11,3122.05 h47.24
  text "12V" at 4145.67,3105.31 h47.24
  text "3V3" at 2224.41,3075.79 h47.24
  text "GND" at 4720.47,2922.24 h47.24 r90
  text "12V" at 4147.64,2908.46 h47.24
  text "GND" at 1245.08,2552.17 h47.24
  text "12V" at 4140.75,2207.68 h47.24
  text "GND" at 4719.49,2003.94 h47.24 r90
  text "12V" at 4137.8,1996.06 h47.24
  text "GND" at 1450.79,1907.48 h47.24 r90
  text "PWM2" at 1545.28,1905.51 h47.24 r90
  text "GND" at 1647.64,1905.51 h47.24 r90
  text "PWM1" at 1747.05,1904.53 h47.24 r90
  text "N.C." at 1352.36,1902.56 h47.24 r90
  text "GND" at 1846.46,1902.56 h47.24 r90
  text "GND" at 2039.37,1902.56 h47.24 r90
  text "GND" at 2786.42,1902.56 h47.24 r90
  text "GND" at 1246.06,1901.57 h47.24 r90
  text "GND" at 1949.8,1900.59 h47.24 r90
  text "N.C." at 1152.56,1899.61 h47.24 r90
  text "VBAT" at 2626.97,1898.62 h47.24 r90
  text "PWM1" at 2700.79,1896.65 h47.24 r90
  text "VBAT" at 3101.38,1885.83 h47.24 r90
  text "PWM2" at 3180.12,1884.84 h47.24 r90
  text "GND" at 3257.87,1882.87 h47.24 r90

## Dimensions
1005.94,5066.26 to 4941.97,5057.4 on Top Overlay
948.82,5000 to 951.77,1655.51 on Top Overlay